# Altium PCB KSIMU.PcbDoc
Units mil, origin at the board's own origin, x right, y up, seen from the top; angles counter-clockwise.
Board outline 590.55 x 1496.06 mil, 4 copper layers (Top Layer, Mid-Layer 1, Mid-Layer 2, Bottom Layer), stack 37.795 mil thick; 53 components, 52 nets, 226 pads, 129 vias.
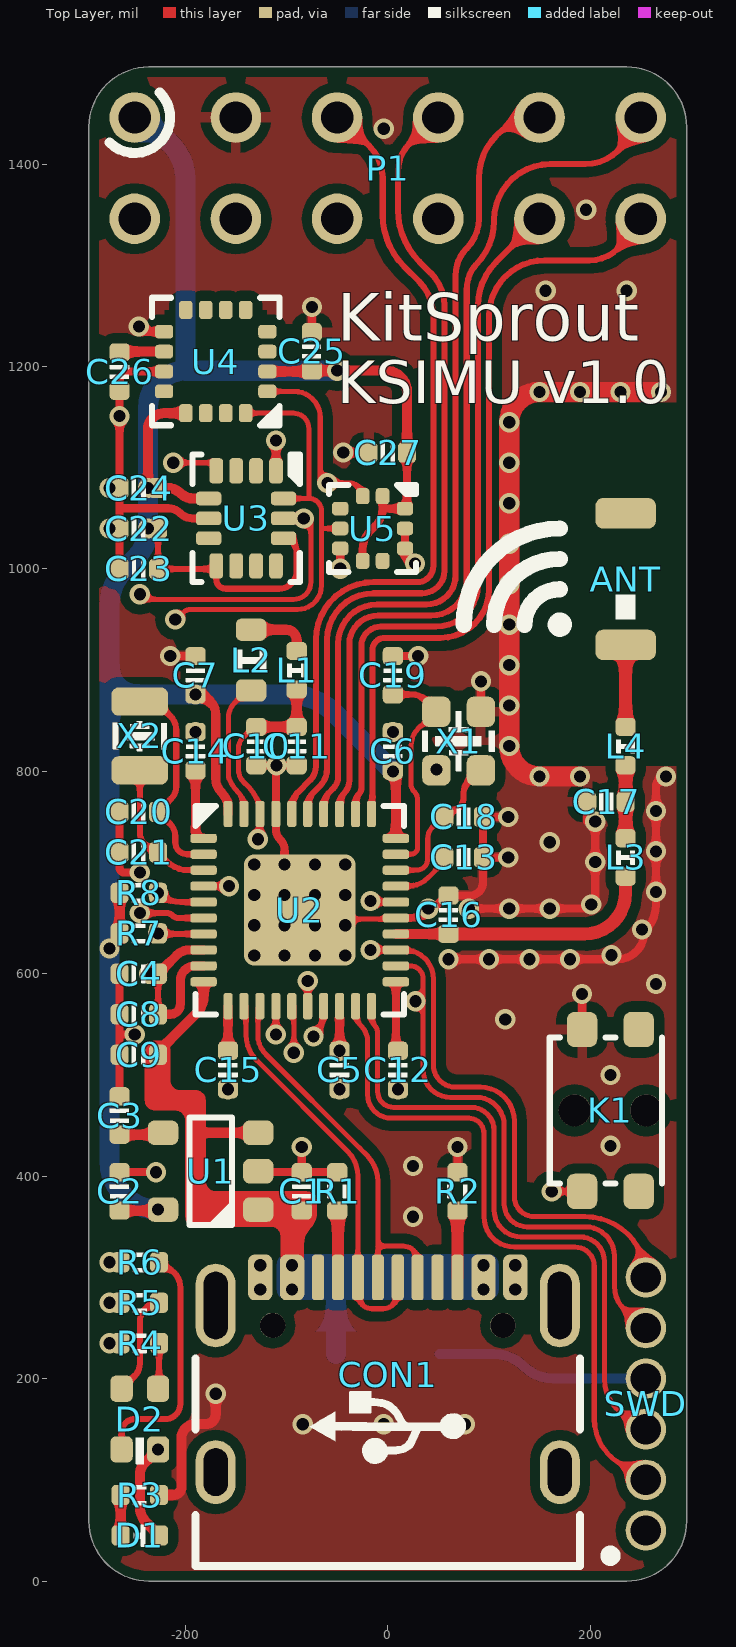
[diagram p0: Top Layer view]
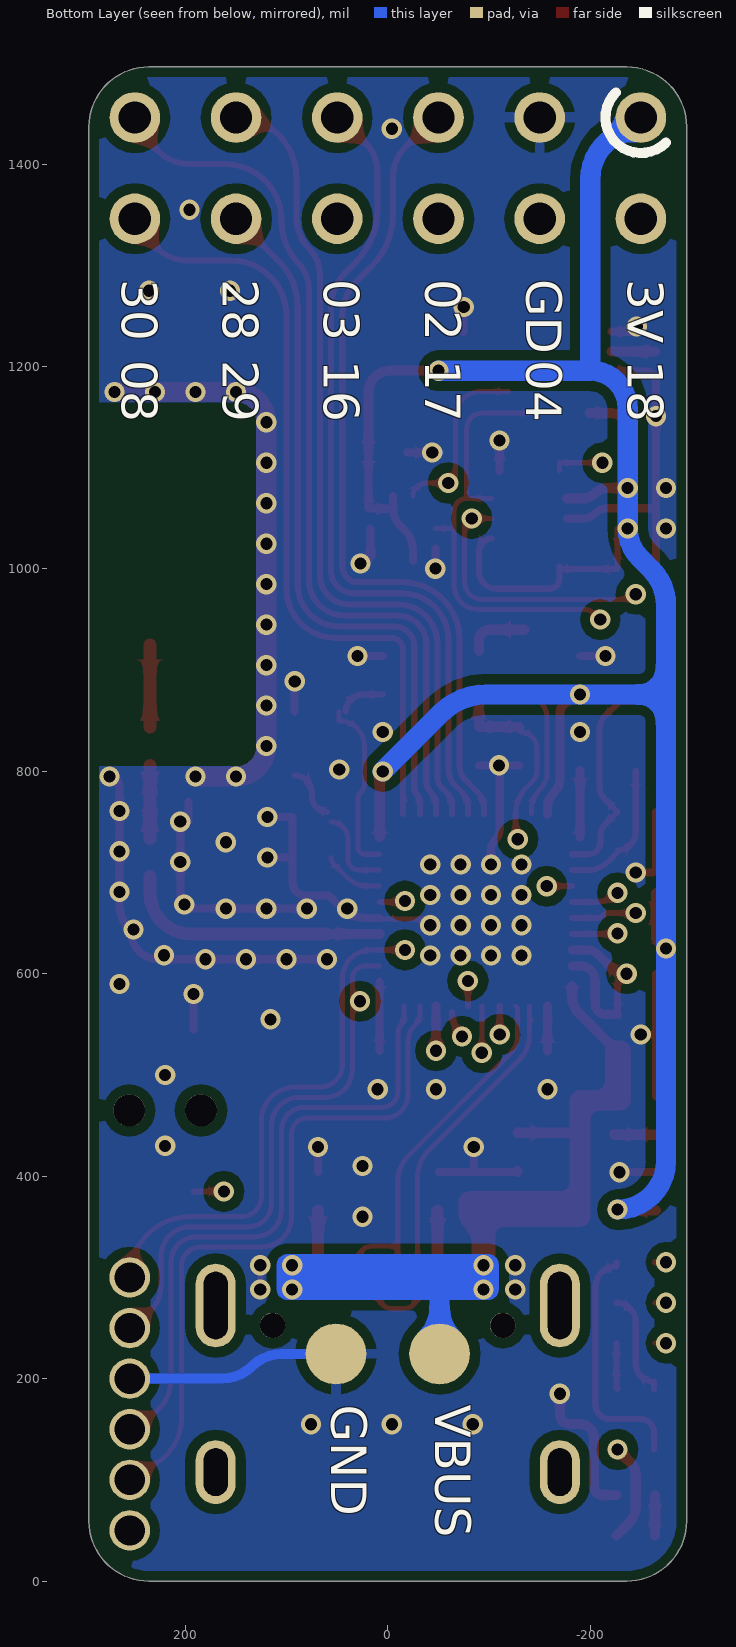
[diagram p1: Bottom Layer view, seen from below]
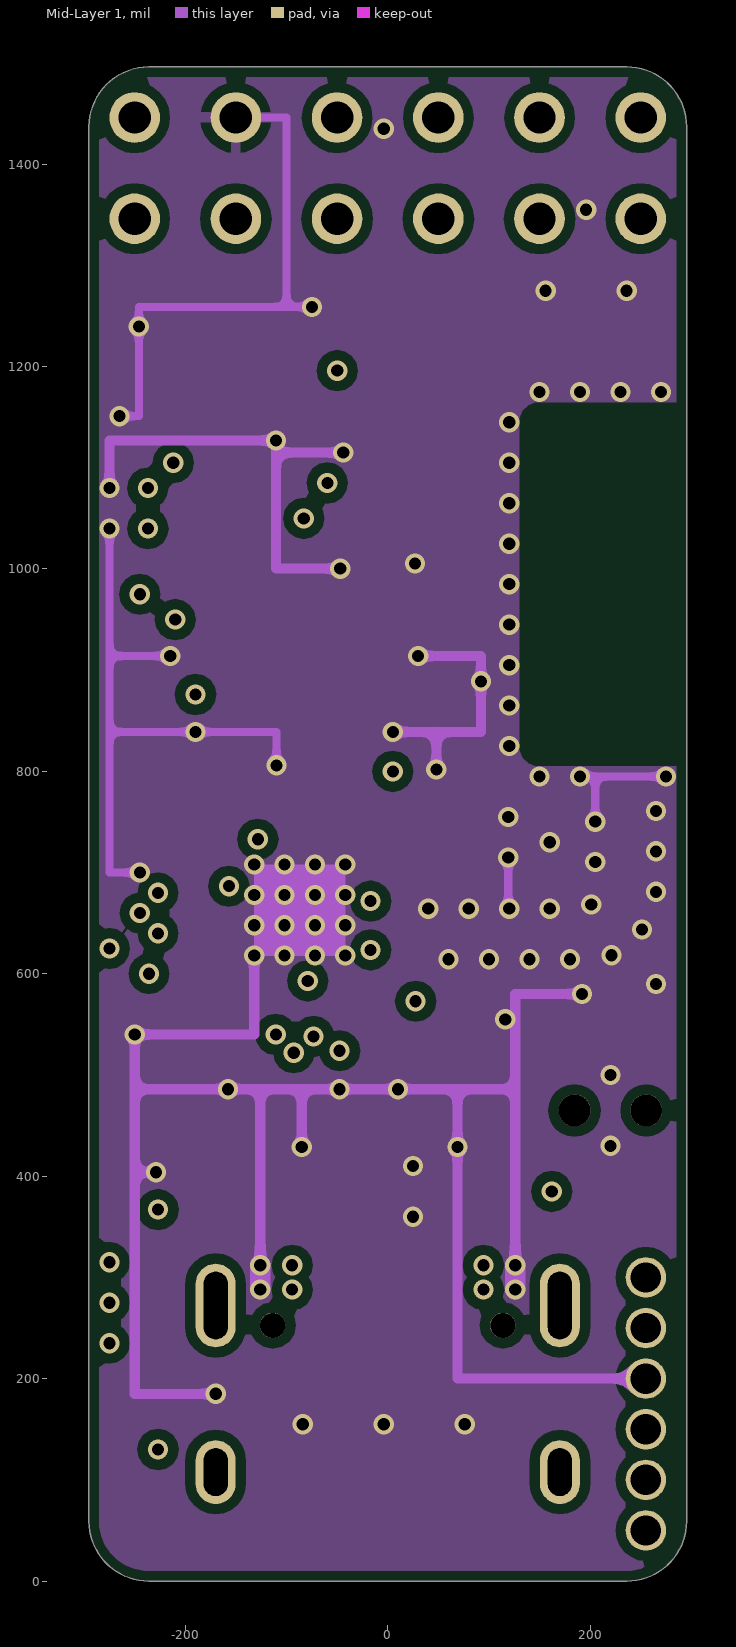
[diagram p2: Mid-Layer 1]
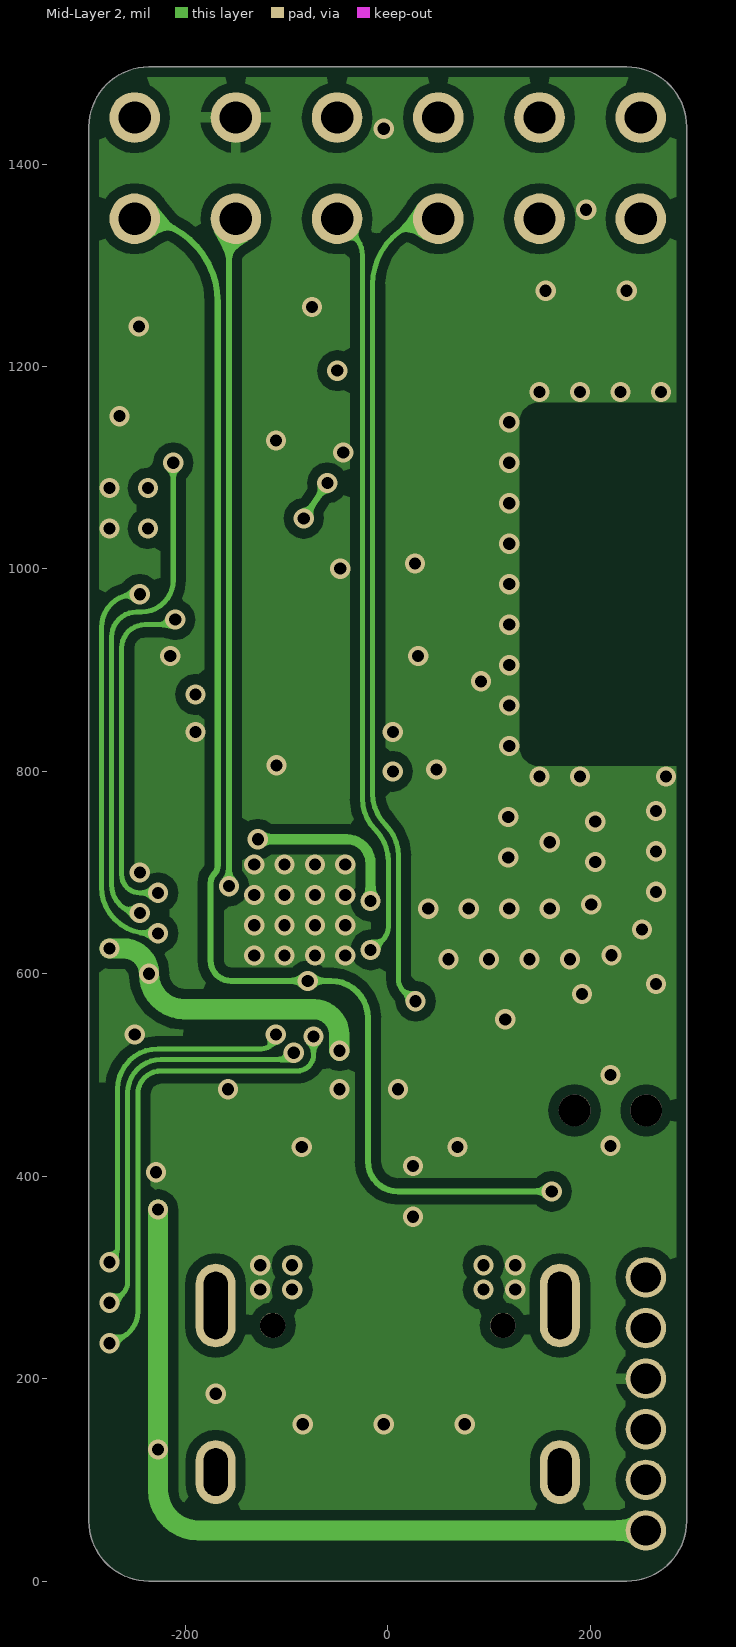
[diagram p3: Mid-Layer 2]
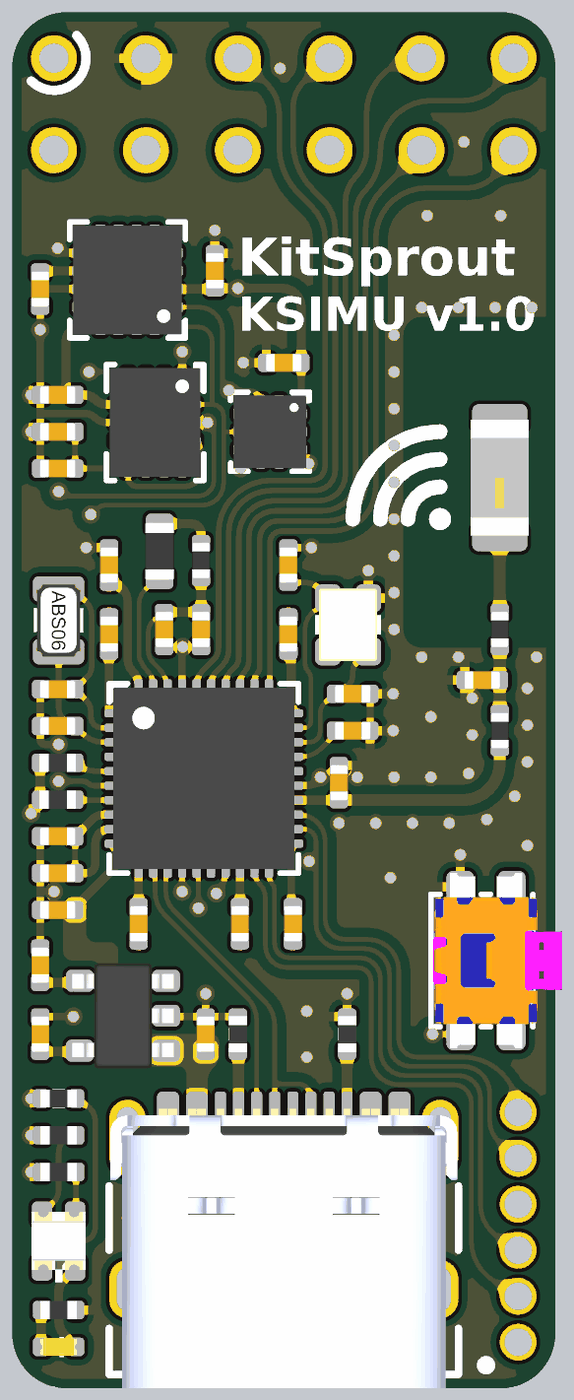
[diagram p4: 3D render of the assembled board from above, using the file's embedded part models]

## Layer stack, top to bottom
Top Solder: solder mask 0.394, Solder Resist, Dk 3.5
Top Layer: signal copper 1.378
Dielectric 1: prepreg 7.677, Dk 4.8
Mid-Layer 1: signal copper 0.689
Dielectric: core 18.307, FR-4, Dk 4.8
Mid-Layer 2: signal copper 0.689
Dielectric2: prepreg 7.677, Dk 4.8
Bottom Layer: signal copper 1.378
Bottom Solder: solder mask 0.3937, Solder Resist, Dk 3.5

## Board outline
-295.28,59.06 -295.28,1437.01 cw(c-236.22,1437.01) -236.22,1496.06 236.22,1496.06 cw(c236.22,1437.01) 295.28,1437.01 295.28,59.06 cw(c236.22,59.06) 236.22,0 -236.22,0 cw(c-236.22,59.06)

## Design rules (kind name [scope] priority, off if disabled: settings)
BoardOutlineClearance [All] p1: gap=10 ignorepadtopadclearanceinfootprint=FALSE except(0: Track-OutlineEdge Track-CavityEdge Track-CutoutEdge Track-SplitBarrior Track-SplitContinuation Text-OutlineEdge Text-CavityEdge Text-CutoutEdge Text-SplitBarrior Text-SplitContinuation)
Clearance "Clearance Polygon 10mil" [InPolygon] p1: gap=10 ignorepadtopadclearanceinfootprint=TRUE except(0: Arc-Hole Track-Hole SMDPad-Hole THPad-Hole Via-Hole Fill-Hole Poly-Hole Region-Hole Text-Hole)
Clearance "Clearance Top Layer 6mil" [OnLayer('Top Layer')] p2 off: gap=6 ignorepadtopadclearanceinfootprint=TRUE except(8: Arc-THPad Arc-Hole Track-THPad Track-Hole SMDPad-THPad SMDPad-Hole THPad-THPad THPad-Hole Via-Hole Fill-Hole Poly-Hole Region-Hole Text-Hole; 10: Arc-Text Track-Text SMDPad-Text THPad-Text Via-Text Fill-Text Poly-Text Region-Text Text-Text)
Clearance "Clearance Top Layer 5mil" [OnLayer('Top Layer')] p3: gap=5 ignorepadtopadclearanceinfootprint=TRUE except(8: Arc-THPad Arc-Hole Track-THPad Track-Hole SMDPad-THPad SMDPad-Hole THPad-THPad THPad-Hole Via-Hole Fill-Hole Poly-Hole Region-Hole Text-Hole; 10: Arc-Text Track-Text SMDPad-Text THPad-Text Via-Text Fill-Text Poly-Text Region-Text Text-Text)
Clearance "Clearance Bottom Layer 6mil" [OnLayer('Bottom Layer')] p4 off: gap=6 ignorepadtopadclearanceinfootprint=TRUE except(8: Arc-THPad Arc-Hole Track-THPad Track-Hole SMDPad-THPad SMDPad-Hole THPad-THPad THPad-Hole Via-Hole Fill-Hole Poly-Hole Region-Hole Text-Hole; 10: Arc-Text Track-Text SMDPad-Text THPad-Text Via-Text Fill-Text Poly-Text Region-Text Text-Text)
Clearance "Clearance Bottom Layer 5mil" [OnLayer('Bottom Layer')] p5: gap=5 ignorepadtopadclearanceinfootprint=TRUE except(8: Arc-THPad Arc-Hole Track-THPad Track-Hole SMDPad-THPad SMDPad-Hole THPad-THPad THPad-Hole Via-Hole Fill-Hole Poly-Hole Region-Hole Text-Hole; 10: Arc-Text Track-Text SMDPad-Text THPad-Text Via-Text Fill-Text Poly-Text Region-Text Text-Text)
Clearance "Clearance 6mil" [All] p6 off: gap=6 ignorepadtopadclearanceinfootprint=TRUE except(8: Arc-THPad Arc-Hole Track-THPad Track-Hole SMDPad-THPad SMDPad-Hole THPad-THPad THPad-Hole Via-Hole Fill-Hole Poly-Hole Region-Hole Text-Hole; 10: Arc-Text Track-Text SMDPad-Text THPad-Text Via-Text Fill-Text Poly-Text Region-Text Text-Text)
Clearance "Clearance 5mil" [All] p7: gap=5 ignorepadtopadclearanceinfootprint=TRUE except(8: Arc-THPad Arc-Hole Track-THPad Track-Hole SMDPad-THPad SMDPad-Hole THPad-THPad THPad-Hole Via-Hole Fill-Hole Poly-Hole Region-Hole Text-Hole; 10: Arc-Text Track-Text SMDPad-Text THPad-Text Via-Text Fill-Text Poly-Text Region-Text Text-Text)
Clearance "Clearance 4mil" [All] p8 off: gap=5 ignorepadtopadclearanceinfootprint=TRUE except(4: Arc-Arc Arc-Track Arc-SMDPad Track-Track Track-SMDPad SMDPad-SMDPad; 8: Arc-THPad Arc-Hole Track-THPad Track-Hole SMDPad-THPad SMDPad-Hole THPad-THPad THPad-Hole Via-Hole Fill-Hole Poly-Hole Region-Hole Text-Hole; 10: Arc-Text Track-Text SMDPad-Text THPad-Text Via-Text Fill-Text Poly-Text Region-Text Text-Text)
ComponentClearance [All] p1: gap=0 collisioncheckmode=3 verticalgap=0 showdistances=FALSE
DiffPairsRouting [All] p1: maxlimit=10 minlimit=5 mostfreqgap=10 toplayer_minwidth=5 toplayer_maxwidth=15 toplayer_prefwidth=15 midlayer1_minwidth=5 midlayer1_maxwidth=15 midlayer1_prefwidth=15 midlayer2_minwidth=5 midlayer2_maxwidth=15 midlayer2_prefwidth=15 bottomlayer_minwidth=5 bottomlayer_maxwidth=15 bottomlayer_prefwidth=15 maxuncoupledlength=500
Height [All] p1: minheight=0 maxheight=5000 prefheight=500
HoleSize [All] p1: absolutevalues=TRUE maxlimit=248.03 minlimit=8 maxpercent=80.000 minpercent=20.000
MinimumAnnularRing [All] p1: minimumring=3
MinimumSolderMaskSliver [All] p1: minsoldermaskwidth=0
PlaneConnect [All] p1: pad.planeconnectstyle=Relief pad.reliefexpansion=20 pad.reliefentries=4 pad.reliefconductorwidth=10 pad.reliefairgap=10 via.planeconnectstyle=Direct via.reliefexpansion=20 via.reliefentries=4 via.reliefconductorwidth=10 via.reliefairgap=10
PolygonConnect [All] p1: thpad.connectstyle=Relief thpad.reliefconductorwidth=10 thpad.reliefentries=4 thpad.polygonreliefangle="90 Angle" thpad.airgapwidth=10 smdpad.connectstyle=Relief smdpad.reliefconductorwidth=10 smdpad.reliefentries=4 smdpad.polygonreliefangle="90 Angle" smdpad.airgapwidth=10 via.connectstyle=Direct via.reliefconductorwidth=10 via.reliefentries=4 via.polygonreliefangle="90 Angle" via.airgapwidth=10
RoutingCorners [All] p1: cornerstyle=Round minsetback=100 maxsetback=100
RoutingVias [All] p1: holewidth=20 width=40 viastyle="Through Hole" minholewidth=8 minwidth=18 maxholewidth=40 maxwidth=80
SMDEntry [All] p1: side=TRUE corner=TRUE anyangle=TRUE
SMDToCorner [All] p1: distance=0
SMDToPlane [All] p1: distance=0
SilkToSilkClearance [All] p1: silktosilkclearance=4
SilkToSolderMaskClearance [IsPad] p1: minsilkscreentomaskgap=0 clearancetoexposedcopper=TRUE
SolderMaskExpansion [All] p1: expansion=4 istentingtop=FALSE
UnRoutedNet [All] p1: checkbadconnections=TRUE
ViasUnderSMD [All] p1: allowed=TRUE
Width "Width 6mil" [All] p1 off: maxlimit=100 minlimit=3.5 preferedwidth=15 toplayer_minwidth=6 bottomlayer_minwidth=6 minimp=50.000000 maximp=50.000000 favimp=50.000000
Width "Width 5mil" [All] p2: maxlimit=100 minlimit=3.5 preferedwidth=15 toplayer_minwidth=5 bottomlayer_minwidth=5 minimp=50.000000 maximp=50.000000 favimp=50.000000
20 further rules are at their usual default settings.

## Components (designator, comment, footprint, x,y, rotation, side; value= is the part's Value field where it differs from the comment)
ANT "2450AT18B100E" ANT_2.4G_3.2x1.6 235,990 r90 top value=-0.5dBi
C1 "C0402" CAP_0402 -85,385 r270 top value=4.7uF
C2 "C0402" CAP_0402 -265,385 r270 top value=4.7uF
C3 "C0402" CAP_0402 -265,460 r270 top value=NC
C4 "C0402" CAP_0402 -246,600 r0 top value=4.7uF
C5 "C0402" CAP_0402 -47.63,505 r90 top value=100nF
C6 "C0402" CAP_0402 5,820 r270 top value=100nF
C7 "C0402" CAP_0402 -190,895 r270 top value=1uF
C8 "C0402" CAP_0402 -246,560 r0 top value=4.7uF
C9 "C0402" CAP_0402 -246,520 r0 top value=4.7uF
C10 "C0402" CAP_0402 -130,825 r90 top value=1uF
C11 "C0402" CAP_0402 -90,825 r90 top value=47nF
C12 "C0402" CAP_0402 10,505 r90 top value=820pF
C13 "C0402" CAP_0402 75,715 r180 top value=100pF
C14 "C0402" CAP_0402 -190,820 r270 top value=100nF
C15 "C0402" CAP_0402 -157.87,505 r90 top value=4.7uF
C16 "C0402" CAP_0402 60,658.38 r270 top value=NC
C17 "C0402" CAP_0402 216,770 r0 top value=1.2pF
C18 "C0402" CAP_0402 75,755 r180 top value=10pF
C19 "C0402" CAP_0402 5,895 r270 top value=10pF
C20 "C0402" CAP_0402 -246,760 r0 top value=10pF
C21 "C0402" CAP_0402 -246,720 r0 top value=10pF
C22 "C0402" CAP_0402 -246,1040 r0 top value=100nF
C23 "C0402" CAP_0402 -246,1000 r0 top value=2.2uF
C24 "C0402" CAP_0402 -246,1080 r0 top value=100nF
C25 "C0402" CAP_0402 -75,1215 r270 top value=1uF
C26 "C0402" CAP_0402 -265,1195 r90 top value=4.7uF
C27 "C0402" CAP_0402 0,1115 r0 top value=0.1uF
CON1 "USB Type C" USB_TypeC_16P 0,150 r0 top locked value="Type C"
D1 "D0402" LED_0402_YELLOW -245,45 r0 top value=WHITE
D2 "D1616" LED_1616_RGB -245,160 r270 top value=RGB
K1 "TACT" Button_TACT_90_4P_3.5x3.55_H 220,465 r90 top locked value=4P
L1 "H0402" IND_0402 -90,900 r90 top value=15nH
L2 "H0603" IND_0603 -135,910 r270 top value=10uH
L3 "H0402" IND_0402 235,715 r90 top value=4.7nH
L4 "H0402" IND_0402 235,825 r90 top value=2.2nH
P1 "HDR2x6" HDR2X6_2.54_180 -0.07,1396.06 r90 top locked value=2.54
R1 "R0402" RES_0402 -50,385 r270 top value=5K1
R2 "R0402" RES_0402 68.9,385 r270 top value=5K1
R3 "R0402" RES_0402 -245,85 r180 top value=5K1
R4 "R0402" RES_0402 -245,235 r0 top value=2K
R5 "R0402" RES_0402 -245,275 r0 top value=10K
R6 "R0402" RES_0402 -245,315 r0 top value=2K
R7 "R0402" RES_0402 -246,640 r180 top value=3K3
R8 "R0402" RES_0402 -246,680 r180 top value=3K3
SWD "HDR1x6" HDR1X6_1.27_180F 255,175 r180 top locked value=1.27
U1 "XC6220B331" SOT23-5 -175,405 r180 top value=3V3
U2 "nRF52820-QDAA" QFN40_P0.4_5.0x5.0_H -87,663 r0 top locked value=64MHz
U3 "ICM42605" ICMx_LGA14_P0.5_2.5x3.0 -140,1050 r270 top
U4 "IST8308" ISTX_LGA16_P0.5_3.0x3.0 -170,1205 r180 top
U5 "LPS22HB" LPSx_LGA10_P0.5_2.0x2.0 -15,1040 r270 top
X1 "XTAL2016" XT_2016_4 70,830 r270 top value=32MHz
X2 "XTAL2012" XT_2012_2 -245,835 r270 top value=32.768kHz

## Footprints (in the part's own frame and the unit in brackets; to place one, negate y for a bottom-side part, rotate by r counter-clockwise, add the part's x,y. Pads: shape width x height; smd on the part's side, far side on the other; paste and mask are expansions set on the pad)
ANT_2.4G_3.2x1.6 [mil]
  rrect50% 30x60 smd: 1(-65,0) 2(65,0)
  silkscreen extent -40,-10 -15,10, body extent -63,-31 63,31, height 51
Button_TACT_90_4P_3.5x3.55_H [mil] "SKSCLDE010"
  rrect50% 35x30 smd: 1(-80,-28) 2(80,-28) 3(-80,28) 4(80,28)
  round 31.5 hole 31.5 unplated mask+0: ""(0,35.43) ""(0,-35.43)
  silkscreen extent -72,-51 72,60, body extent -95,-83 95,57, height 50
CAP_0402 [mil]
  rrect50% 18x20 smd: 1(-19,0) 2(19,0)
  silkscreen extent -7,-9 7,9, body extent -20,-10 20,10, height 20
HDR1X6_1.27_180F [mil]
  round 40 hole 30: 1(0,125) 2(0,75) 3(0,25) 4(0,-25) 5(0,-75) 6(0,-125)
HDR2X6_2.54_180 [mil]
  round 50 hole 32: 1(-50,250) 2(50,250) 3(-50,150) 4(50,150) 5(-50,50) 6(50,50) 7(-50,-50) 8(50,-50) 9(-50,-150) 10(50,-150) 11(-50,-250) 12(50,-250)
ICMx_LGA14_P0.5_2.5x3.0 [mil]
  rrect50% 25x13.5 smd: 1(-47,29.53) 2(-47,9.84) 3(-47,-9.84) 4(-47,-29.53) 8(47,-29.53) 9(47,-9.84) 10(47,9.84) 11(47,29.53)
  rrect50% 13.5x25 smd: 5(-19.68,-37) 6(0,-37) 7(19.69,-37) 12(19.69,37) 13(0,37) 14(-19.68,37)
  silkscreen extent -63,-53 63,53, body extent -59,-49 59,49, height 38
IND_0402 [mil]
  rrect50% 18x20 smd: 1(-19,0) 2(19,0)
  silkscreen extent -7,-9 7,9, body extent -20,-10 20,10, height 20
IND_0603 [mil]
  rrect50% 22x30 smd: 1(-30,0) 2(30,0)
  silkscreen extent -10,-15 10,15, body extent -31,-16 31,16, height 31
ISTX_LGA16_P0.5_3.0x3.0 [mil]
  rrect50% 18x13.5 smd: 1(-51,29.53) 2(-51,9.84) 3(-51,-9.84) 4(-51,-29.53) 9(51,-29.53) 10(51,-9.84) 11(51,9.84) 12(51,29.53)
  rrect50% 13.5x18 smd: 5(-29.53,-51) 6(-9.84,-51) 7(9.84,-51) 8(29.53,-51) 13(29.53,51) 14(9.84,51) 15(-9.84,51) 16(-29.53,51)
  silkscreen extent -63,-63 63,63, body extent -59,-59 59,59, height 39
LED_0402_YELLOW [mil]
  rrect50% 18x20 smd: 1(19,0.01) 2(-19,0.01)
  silkscreen extent -6,-11 6,10, body extent -20,-10 20,10, height 18
LED_1616_RGB [mil]
  rrect50% 26x22 smd: 1(-30,-18) 2(-30,18) 3(30,18) 4(30,-18)
  silkscreen extent 18,-3 44,4, body extent -32,-29 31,30, height 13
LPSx_LGA10_P0.5_2.0x2.0 [mil]
  rrect50% 16x13.5 smd: 1(-32,9.84) 2(-32,-9.84) 6(32,-9.84) 7(32,9.84)
  rrect50% 13.5x16 smd: 3(-19.68,-32) 4(0,-32) 5(19.69,-32) 8(19.69,32) 9(0,32) 10(-19.68,32)
  silkscreen extent -43,-43 43,43, body extent -39,-39 39,39, height 31
QFN40_P0.4_5.0x5.0_H [mil]
  rrect50% 26x9 smd: 1(-95,70.87) 2(-95,55.12) 3(-95,39.37) 4(-95,23.62) 5(-95,7.87) 6(-95,-7.87) 7(-95,-23.62) 8(-95,-39.37) 9(-95,-55.12) 10(-95,-70.87) 21(95,-70.87) 22(95,-55.12) 23(95,-39.37) 24(95,-23.62) 25(95,-7.87) 26(95,7.87) 27(95,23.62) 28(95,39.37) 29(95,55.12) 30(95,70.87)
  rrect50% 9x26 smd: 11(-70.87,-95) 12(-55.12,-95) 13(-39.37,-95) 14(-23.62,-95) 15(-7.87,-95) 16(7.87,-95) 17(23.62,-95) 18(39.37,-95) 19(55.12,-95) 20(70.87,-95) 31(70.87,95) 32(55.12,95) 33(39.37,95) 34(23.62,95) 35(7.87,95) 36(-7.87,95) 37(-23.62,95) 38(-39.37,95) 39(-55.12,95) 40(-70.87,95)
  rrect20% 110x110 smd paste-100: 41(0,0)
  rrect20% 45x45 on Top Paste: ""(-27,-27) ""(-27,27) ""(27,-27) ""(27,27)
  silkscreen extent -103,-103 103,103, body extent -98,-98 98,98, height 33
RES_0402 [mil]
  rrect50% 18x20 smd: 1(-19,0) 2(19,0)
  silkscreen extent -7,-10 7,10, body extent -20,-10 20,10, height 14
SOT23-5 [mil]
  rrect50% 30x24 smd: 1(-47,38) 2(-47,0) 3(-47,-38) 4(47,-38) 5(47,38)
  silkscreen extent -21,-53 21,53, body extent -55,-57 55,57, height 45
USB_TypeC_16P [mm]
  rrect50% 0.61x1.143 smd: 1(-3.2,3.81) 2(-2.4,3.81) 11(2.4,3.81) 12(3.2,3.81)
  rrect50% 0.305x1.143 smd: 3(-1.75,3.81) 4(-1.25,3.81) 5(-0.75,3.81) 6(-0.25,3.81) 7(0.25,3.81) 8(0.75,3.81) 9(1.25,3.81) 10(1.75,3.81)
  oval 1x2.1 hole 0.6 slot 1.7 at 90 deg: SH(-4.32,3.105) SH(4.32,3.105)
  oval 1x1.6 hole 0.6 slot 1.2 at 90 deg: SH(-4.32,-1.075) SH(4.32,-1.075)
  round 0.635 hole 0.635 unplated mask+0: ""(-2.89,2.605) ""(2.89,2.605)
  silkscreen extent -4.83,-3.43 4.83,1.78, body extent -4.79,-3.8 4.79,3.91, height 3.31
XT_2012_2 [mil]
  rrect50% 28x56 smd: 1(-34,0) 2(34,0)
  silkscreen extent -14,-27 14,27, body extent -39,-24 39,24, height 24
XT_2016_4 [mil]
  rrect50% 30x28 smd: 1(29,22) 2(-29,22) 3(-29,-22) 4(29,-22)
  silkscreen extent -30,-36 30,36, body extent -39,-31 39,32, height 22

## Part data
ANT: library part ANT_2.4G, "Antenna", Specification="2.45GHz 50R", Type=3.2x1.6mm
C1 C2 C3 C4 C5 C6 C7 C8 C9 C10 C11 C12 C13 C14 C15 C16 C17 C18 C19 C20 C21 C22 C23 C24 C25 C26 C27: library part Cap_0402, "Capacitor", Note=±10%, Specification="X7R, 16V", Type=0402
CON1: library part USB_TypeC_16P_A, "USB TypeC", Type=Female
D1: library part LED_0402, "LED", Type=0402
D2: library part LED_1616_RGB, "LED", Type=1616
K1: library part Button_TACT_90_4P_3.5×3.55, "Button", Manufacturer="Alps Alpine", Datasheet=https://tech.alpsalpine.com/prod/e/html/tact/surfacemount/sksc/sksclde010.html, Link=https://www.mouser.tw/ProductDetail/?qs=6EGMNY9ZYDQWpz3nhZNkIQ%3D%3D, Specification=3.5x3.55mm, Type=TACT
L1 L3 L4: library part Ind_0402, "Inductor", Note=±5%, Specification="High frequency chip inductor", Type=0402
L2: library part Ind_0603, "Inductor", Note=±5%, Specification="High frequency chip inductor", Type=0603
P1: library part HDR2x6_2.54, "Header", Note=2x6, Type=DIP
R1 R2 R3 R4 R5 R6 R7 R8: library part Res_0402, "Resistor", Note=±1%, Specification=1/16W, Type=0402
SWD: library part HDR1x6_1.27, "Header", Note=1x6, Type=DIP
U1: library part XC6220x_SOT25, "LDO", Manufacturer="Torex Semiconductor", Datasheet=https://www.torexsemi.com/file/xc6220/XC6220.pdf, Link=https://www.torexsemi.com/products/single-type-voltage-regulators/series/?name=xc6220, Note="MaxInput 6.5V", Specification=1000mA, Type=SOT23-5
U2: "MCU Nordic", Manufacturer="Nordic Semiconductor", Datasheet=https://infocenter.nordicsemi.com/index.jsp?topic=%2Fps_nrf52833%2Fkeyfeatures_html5.html, Link=https://www.nordicsemi.com/Products/Low-power-short-range-wireless/nRF52820, Note=CortexM4, Specification="256K Flash, 32K SRAM", Type="QFN40 P0.4"
U3: "Motion Sensor", Manufacturer="TDK InvenSense", Datasheet=http://invensense.tdk.com/wp-content/uploads/2020/09/DS-000292-ICM-42605-v1.5.pdf, Link=https://invensense.tdk.com/products/motion-tracking/6-axis/icm-42605/, Specification="2.5x3.0x0.91 mm", Type="LGA14 P0.5"
U4: "Magnetometer Sensor", Manufacturer=iSentek, Datasheet=http://www.isentek.com/zhtw/the_product.php?pid=4, Link=http://www.isentek.com/zhtw/the_product.php?pid=4, Specification="3.0x3.0x1.0 mm", Type="LGA16 P0.5"
U5: "Pressure Sensor", Manufacturer=STMicroelectronics, Datasheet=https://www.st.com/resource/en/datasheet/lps22hb.pdf, Link=https://www.st.com/content/st_com/en/products/mems-and-sensors/pressure-sensors/lps22hb.html, Specification="2.0x2.0x0.76 mm", Type="LGA10 P0.5"
X1: library part XTAL_2016_4P, "Crystal Oscillator", Specification=±10ppm, Type=XTAL2016_4P
X2: library part XTAL_32.768k_2P, "Crystal Oscillator", Specification=±10ppm, Type=XTAL2012_2P

## Free pads (board coordinates)
  round 60 smd far side paste-100: 1(-51.18,224.41) 2(51.18,224.41)

## Via types
v1: diameter 20, hole 12, Top Layer to Bottom Layer, tented both sides, 129 vias

## Nets (pads, with @x,y where several pads share a name; then routed paths per layer and width w, separated by ;. In a path a pad name is that pad's centre, name@x,y a point inside that pad or via, vN(x,y) a via of type N, cw(c..) or ccw(c..) an arc to the next point about the centre after c; other vN are vias at no path point)
+3V3: C2.2 C4.2 C5.2 C6.2 C7.2 C8.2 C22.2 C23.2 C24.2 C25.2 C27.2 D1.1 D2.3 P1.2 R7.2 R8.2 SWD.1 U1.5 U2.8 U2.9 U2.18 U2.30 U2.40 U3.5 U3.8 U3.12 U4.2 U4.13 U5.1 U5.6 U5.10 | length 4092.3
  Top Layer w6: v1(-237,1080) C24.2 ; v1(-236,600) cw(c-236,591) -227,591 C8.2 ; C22.2 C23.2 U3.8@-169.53,1000 ; U3.8 U3.8@-169.53,1000 ; U3.12 cw(c-103,1017.31) -90,1017.31 -90,998 cw(c-107.5,998) -107.5,980.5 -160,980.5 cw(c-160,990.03) -169.53,990.03 U3.8@-169.53,1000 ; C25.2@-75.84,1195.16 -75.84,1196 C25.2
  Top Layer w8: U5.6 -24.84,1019.08 cw(c1.9,1019.08) -17.02,1037.98 -12.12,1042.88 ccw(c-28.92,1059.68) -5.16,1059.68 ; U5.1 -5.16,1059.68 ; U5.10 -5.16,1059.68 ; U5.10@19,1059.68 C27.2
  Top Layer w9: C8.2 -215,560 ccw(c-215,570) -205,570 -205,593 cw(c-190.12,593) -190.12,607.88 U2.9 ; C4.2@-226,601 -208.49,618.51 cw(c-196.12,606.12) -196.12,623.63 U2.8 ; v1(-190,876) cw(c-190,856) -170,856 -170,792.86 ccw(c-151.03,792.86) -164.44,779.44 cw(c-180.32,763.56) -157.87,763.56 U2.40 ; v1(-47.63,524) U2.18
  Top Layer w10: v1(-275,625) -265,635 R7.2 R8.2 ; C2.2 U1.5@-223,366 ; v1(-237,1080) -237,1138 cw(c-221,1138) -221,1154 U4.13 ; v1(-227,130) -240,117 ccw(c-227.93,104.93) -245,104.93 -245,74 ccw(c-220.87,74) -237.94,56.95 D1.1 ; C24.2 -217.29,1080 cw(c-217.29,1062.39) -204.85,1074.85 ; -204.82,1074.82 ccw(c-192.39,1087.29) -192.39,1069.68 U3.5 ; U4.2 C25.2@-75.84,1195.16 ; C25.2 v1(-50,1196) -2,1196 cw(c-2,1175) 19,1175 C27.2 ; U2.30@8,735 C6.2@8,793 ; SWD.1@250.01,45.01 SWD.1
  Mid-Layer 2 w20: v1(-275,625) -261,625 cw(c-261,600) v1(-236,600) ccw(c-201,600) -201,565 -73,565 cw(c-73,540) -48,540 -48,524.37 v1(-47.63,524) ; v1(-227,367) v1(-227,130) -227,90 ccw(c-187,90) -187,50 SWD.1
  Bottom Layer w20: P1.2 -250.07,1435.07 cw(c-250.07,1385) -200,1385 -200,1196 ; v1(-227,367) cw(c-227,415) -275,415 v1(-275,625) -275,876 ; v1(-50,1196) -200,1196 ; v1(5,800) -52.5,857.5 ccw(c-97.16,812.84) -97.16,876 v1(-190,876) -275,876 ; -275,876 -275,945 -275,963.79 cw(c-223.79,963.79) -260,1000 -249.02,1010.98 ccw(c-278.04,1040) v1(-237,1040) v1(-237,1080) -237,1159 cw(c-200,1159) -200,1196
+VBUS: C1.2 C9.2 CON1.2 CON1.11 pad.1 U1.1 U1.3 U2.10 | length 616.2
  Top Layer w10: U2.10@-182,588 -182,578 cw(c-206.14,578) -189.07,560.93 -224.88,525.12 ccw(c-219.76,520) C9.2 -227,470 -190,470 -190,443 ; U1.3 -190,443 ; CON1.2 v1(-94.49,312) C1.2@-94.49,366 ; C1.2 C1.2@-94.49,366 ; -190,443 -190,366 -128,366 C1.2@-94.49,366
  Bottom Layer w20: v1(-94.49,288) -51.18,288 pad.1
  other v1: 94.49,288 94.49,312
ANT: ANT.1 L4.2 | length 81
  Top Layer w13: L4.2 ANT.1
CAP: C26.2 U4.10 | length 44.3
  Top Layer w5: C26.2 C26.2@-264.16,1214.84
  Top Layer w10: C26.2@-264.16,1214.84 U4.10
CC1: CON1.4 R1.2 | length 70.2
  Top Layer w6: R1.2@-49.21,366 R1.2@-45,366
  Top Layer w12: CON1.4 R1.2@-49.21,366
CC2: CON1.10 R2.2 | length 66
  Top Layer w12: CON1.10 R2.2
D+: CON1.6 CON1.8 U2.13 | length 362.8
  Top Layer w5: -128.37,539.72 ccw(c-100.97,539.72) -120.34,520.34 -27.66,427.66 -20.61,420.6 cw(c-46.59,394.62) -9.84,394.62 -9.84,330.92 ; -128.37,539.76 -128.37,566 U2.13 ; CON1.6 -9.84,330.92 ; CON1.8@29.68,316.67 ccw(c15.43,316.67) 15.43,330.92 -9.84,330.92
D-: CON1.5 CON1.7 U2.12 | length 366.4
  Top Layer w5: U2.12@-140.12,568 -140.12,540 ccw(c-104.19,540) -129.6,514.6 -39.8,424.8 cw(c-64.6,400) -29.53,400 CON1.5 ; CON1.5@-29.68,283.33 ccw(c-15.43,283.33) -15.43,269.08 -4.57,269.08 ccw(c-4.57,283.33) CON1.7@9.69,283.33
DCC: L2.2 U2.39 | length 134.3
  Top Layer w5: U2.39 -142.12,766.13 ccw(c-159.56,766.13) -147.21,778.44 cw(c-116.16,809.51) -156.74,792.7 cw(c-147.5,796.53) -157.5,796.53 -157.5,852.5 cw(c-135,852.5) L2.2@-135,875
DEC1: C14.2 U2.1 | length 66
  Top Layer w9: U2.1@-190,735 C14.2
DEC3: C13.2 U2.27 | length 60.5
  Top Layer w5: U2.27 19.77,686.62 ccw(c19.77,715.23) 40,695 53.17,708.17 ccw(c46.34,715) C13.2
DEC4: C10.2 C11.2 L1.1 U2.26 U2.38 | length 386.1
  Top Layer w5: C10.2@-131,839 ccw(c-131,822.5) -147.5,822.5 -147.5,801.5 ccw(c-130.6,801.5) -142.56,789.56 -137.24,784.24 cw(c-163.48,758) U2.38
  Top Layer w6: v1@-126.37,733 U2.38 ; v1@-16.99,670.86 U2.26
  Top Layer w10: C10.2 C11.2 L1.1
  Mid-Layer 2 w10: v1(-128.37,733) -40.92,733 cw(c-40.92,709.08) -17,709.08 v1(-17,671.85)
DEC5: C12.2 U2.21 | length 68.1
  Top Layer w8: C12.2@8,524 U2.21
DECUSB: C15.2 U2.11 | length 44
  Top Layer w9: C15.2 U2.11
GND: C1.1 C2.1 C3.1 C4.1 C5.1 C6.1 C7.1 C8.1 C9.1 C10.1 C11.1 C12.1 C13.1 C14.1 C15.1 C16.1 C17.1 C18.1 C19.1 C20.1 C21.1 C22.1 C23.1 C24.1 C25.1 C26.1 C27.1 CON1.1 CON1.12 K1.4 P1.4 pad.2 R1.1 R2.1 R3.1 SWD.4 U1.2 U2.25 U2.37 U2.41 U3.1 U3.6 U4.9 U4.11 U5.5 U5.8 U5.9 X1.2 X1.4 | length 7150.5
  Top Layer w5: v1(-42,648) -36,654 U2.25@8,654
  Top Layer w6: v1(125.98,288) CON1.12
  Top Layer w8: C2.1 v1(-229,404) ; C3.1 C9.1 -265,540 ; C4.1 C8.1 -265,540 ; C20.1 C21.1 -265,705 ccw(c-260,705) -260,700 v1(-245,700) ; C23.1 C22.1 -265,1060 ; v1(-250,540) -265,540 ; v1@-246,1234.53 U4.9 ; U4.11 -255.42,1195.16 ccw(c-255.42,1185.58) -265,1185.58 C26.1 v1(-265,1151) C24.1 -265,1060 ; v1(-215,914) C7.1 ; U3.6 -192.93,1050 cw(c-192.93,1067.07) -205,1055 ccw(c-217.07,1042.93) -217.07,1060 -265,1060 ; C10.1 v1@-110.62,806 ; U1.2@-128,404 C1.1 ; U3.1 v1(-110.47,1127) ; -106.3,732.67 cw(c-116.72,722.28) -102,722.28 v1(-102,708) ; -106.31,732.69 cw(c-95.9,743.1) -110.62,743.1 U2.37 v1@-110.62,806 ; C11.1 v1(-110,806) v1@-110.62,806 ; v1(-85,429) C1.1 ; C25.1 v1(-75,1259) ; R1.1 C1.1 ; v1(-47,1000.31) U5.5 ; v1(-44,1115) C27.1 ; C19.1 v1(30,914) ; U2.25 22.66,655.13 ccw(c22.66,686.71) 45,664.38 56.59,675.96 cw(c60,672.55) C16.1 81.38,677.38 ccw(c81.38,690) 94,690 C13.1 ; U5.8@17,1015.31 ccw(c27,1015.31) v1(27,1005.31) ; U5.8 U5.9 ; v1(60,614.38) v1(100,614.38) v1(140,614.38) v1(180,614.38) 220,614.38 227,614.38 ccw(c227,640.66) 253.28,640.66 ccw(c225,668.95) 265,668.95 v1(265,681) v1(265,721) v1(265,761) 265,785 cw(c275,785) v1(275,795) ; R2.1 v1(68.9,429) ; v1(80,664.38) v1(120,664.38) v1(160,664.38) 200,664.38 205,664.38 v1(205,710.36) v1(205,750.36) 197,750.36 C17.1 ; X1.2 v1(92,889) ; v1(119,715) C13.1 ; v1(119,755) C18.1 C13.1 ; K1.4 v1(192,580)
  Top Layer w10: R3.1 -211.88,85 ccw(c-211.88,93) -203.88,93 -203.88,141.12 cw(c-190,141.12) -190,155 -180,155 ccw(c-180,165) -170,165 v1(-170,185) ; U1.2@-128,404 U1.2 ; U5.8@17,1015.31 U5.8
  Top Layer w20: v1(190,795) v1(150,795) cw(c150,825) v1(120,825) v1(120,865) v1(120,905) v1(120,945) v1(120,985) v1(120,1025) v1(120,1065) v1(120,1105) v1(120,1145) cw(c150,1145) v1(150,1175) v1(190,1175) v1(230,1175) v1(270,1175)
  Mid-Layer 1 w6: v1(-102,708) v1@-102,711.79
  Mid-Layer 1 w8: v1(-275,1040) -275,914 ; v1(-265,1151) -246,1151 v1(-246,1239.53) -246,1259 -100,1259 ; v1(-245,700) -275,700 -275,839 ; v1(-215,914) -275,914 ; P1.4 -100,1446.06 -100,1259 ; v1(-110,806) -110,839 v1(-190,839) -275,839 ; v1(-75,1259) -100,1259 ; v1(119,715) 119,665.38 ccw(c120,665.38) v1(120,664.38) ; v1(205,750.36) 205,795 v1(190,795) v1(275,795) ; -275,839 -275,914
  Mid-Layer 1 w10: v1(-275,1080) -275,1127 v1(-110.47,1127) -110.47,1115 ; v1(-229,404) -250,404 ; v1(-170,185) -250,185 -250,404 ; v1(-132,618) -132,540 v1(-250,540) -250,486 ; v1(-125.98,312) -125.98,486 ; v1(-85,429) -85,486 ; v1(-47,1000.31) -110.47,1000.31 -110.47,1115 ; v1(-44,1115) -110.47,1115 ; v1(5,839) 48,839 ; v1(30,914) 92,914 v1(92,889) 92,839 48,839 ; v1(48,801.96) 48,839 ; v1(125.98,312) 125.98,486 ; v1(192,580) 125.98,580 125.98,486 ; SWD.4 68.9,200 v1(68.9,429) 68.9,486 ; -250,404 -250,486 ; -250,486 v1(-157.87,486) -125.98,486 ; -125.98,486 -85,486 ; -85,486 v1(-47.63,486) v1(10,486) 68.9,486 ; 68.9,486 125.98,486
  Mid-Layer 1 w20: v1(-125.98,288) v1(-125.98,312) ; v1(125.98,288) v1(125.98,312)
  Bottom Layer w6: v1@-51.87,1115 v1@-49,1115
  Bottom Layer w10: pad.2 104.79,224.41 cw(c104.79,182.74) 134.25,212.2 ccw(c163.72,241.67) 163.72,200 SWD.4
  other v1: -84,155 -4,155 76,155 25,360 25,410 220,430 220,500 116,555 265,590 -102,618 -72,618 -42,618 221,618.38 251.28,643.66 -132,648 -102,648 -72,648 40,664.38 201,668.38 -132,678 -102,678 -72,678 -42,678 -132,708 -72,708 -42,708 160,730 156,1275 236,1275 196,1355 -4,1435
GPIO1: P1.3 U2.4 | length 684.4
  Top Layer w6: U2.4 v1(-157,686.62)
  Mid-Layer 2 w6: v1(-157,686.62) P1.3@-157,1346.06
GPIO2: P1.9 U2.32 | length 701.3
  Top Layer w6: U2.32 -31.88,769.77 cw(c-21.39,769.77) -28.81,777.19 ccw(c-35.27,783.65) -26.13,783.65 -26.13,923.87 cw(c-7,923.87) -7,943 47.44,943 ccw(c47.44,984.56) 89,984.56 89,1260 cw(c149.68,1260) 106.77,1302.91 P1.9
GPIO3: P1.11 U2.31 | length 786.1
  Top Layer w6: U2.31@-15.13,758 -15.13,919.87 cw(c-3,919.87) -3,932 52,932 ccw(c52,980) 100,980 100,1250 cw(c155,1250) 107.19,1277.19 cw(c155,1250) 127.81,1297.81 cw(c155,1250) 155,1305 199.03,1305 ccw(c199.03,1346.06) 240.09,1346.06 P1.11
GPIO4: P1.6 U2.36 | length 822.4
  Top Layer w6: U2.36 -94.87,765.2 cw(c-75.2,765.2) -89.11,779.11 -76.5,791.73 ccw(c-89.77,805) -75.44,792.88 -75.24,793.11 ccw(c-84.5,801.5) -73.12,796.33 -73.05,796.46 ccw(c-89.77,805) -71,805 -71,930.19 cw(c-14.19,930.19) -14.19,987 29.22,987 ccw(c29.22,1002.78) 45,1002.78 45,1250 ccw(c-3.28,1250) 30.88,1284.12 ; P1.6 -50.07,1431.27 cw(c-50.07,1386.2) -5,1386.2 -5,1350 ccw(c67.43,1350) 16.21,1298.79 30.86,1284.14
GPIO5: P1.8 U2.35 | length 817.7
  Top Layer w6: U2.35 -79.13,766.06 cw(c-61.06,766.06) -73.83,778.83 -66.92,785.75 ccw(c-83.62,802.45) -60,802.45 -60,930 cw(c-14,930) -14,976 33.77,976 ccw(c33.77,998.23) 56,998.23 56,1260 ccw(c10.13,1260) 42.59,1292.41 ; 42.57,1292.43 31.21,1303.79 cw(c82.43,1355) 10,1355 10,1392.43 cw(c49.93,1392.43) 49.93,1432.35 P1.8
GPIO6: P1.10 U2.34 | length 820.1
  Top Layer w6: U2.34 -63.38,766.92 cw(c-46.92,766.92) -58.57,778.55 -53.78,783.33 ccw(c-65.31,794.87) -49,794.87 -49,926.41 cw(c-10.41,926.41) -10.41,965 38.33,965 ccw(c38.33,993.67) 67,993.67 67,1289.88 cw(c106.41,1289.92) 70,1305 cw(c102.61,1291.49) 77.68,1316.48 ccw(c47.84,1346.26) 90,1346.26 90,1386.13 cw(c149.93,1386.13) P1.10
GPIO7: P1.12 U2.33 | length 887.9
  Top Layer w6: U2.33 -47.63,767.77 cw(c-32.77,767.77) -43.28,778.28 ccw(c-56.02,791.02) -38,791.02 -38,925.77 cw(c-9.77,925.77) -9.77,954 42.89,954 ccw(c42.89,989.11) 78,989.11 78,1275.19 ; 78,1275.24 cw(c121.74,1275.24) 81.36,1292.05 cw(c104.69,1282.3) 86.79,1300.16 86.85,1300.22 ccw(c42.9,1344.09) 105,1344.09 105,1344.66 cw(c160.34,1344.66) 160.34,1400 195.12,1400 ccw(c195.12,1446.06) 241.19,1446.06 P1.12
IMU_FYC: U3.9
IMU_INT: U2.6 U3.4 | length 612.6
  Top Layer w5: v1(-212,1105) -169.53,1105 U3.4
  Top Layer w6: v1(-245,660) -218.48,660 cw(c-218.48,651.68) -212.59,657.56 ccw(c-206.71,663.45) -206.71,655.13 U2.6
  Mid-Layer 2 w5: v1(-245,660) cw(c-245,688) -273,688 -273,932.7 cw(c-248.2,932.7) -248.2,957.5 -243.38,957.5 ccw(c-243.38,988.88) -212,988.88 v1(-212,1105)
IMU_INTB: U5.7
IMU_SCL: R7.1 U2.7 U3.13 U4.1 U5.2 | length 918.3
  Top Layer w5: v1(-245,975) -240,970 -93,970 ccw(c-93,987) -76,987 v1@-76,1050 ; U4.1 -92.47,1175.47 cw(c-92.47,1149.74) -66.74,1149.74 -66.74,1092 ccw(c-59.74,1092) v1(-59.74,1085) -37.84,1085 cw(c-37.84,1072) U5.2 ; U3.13 v1(-83,1050)
  Top Layer w6: R7.1@-226.38,639.38 U2.7
  Mid-Layer 2 w5: v1@-250,975 ccw(c-250,942) -283,942 -283,686.05 ccw(c-236.95,686.05) -236.95,640 v1(-227,640)
  Mid-Layer 2 w6: v1(-83,1050) v1(-59.74,1085)
IMU_SDA: R8.1 U2.5 U3.14 U4.16 U5.4 | length 831.8
  Top Layer w5: v1@-215,945 v1@-210,945 ; v1(-210,950) -205,950 cw(c-195,950) -195,960 -89.17,960 ccw(c-89.17,983.67) -65.5,983.67 -65.5,1040 -65.5,1057.25 ccw(c-77.94,1057.25) -77.94,1069.68 ; U4.16 -93.4,1154 cw(c-93.4,1138.54) -77.94,1138.54 -77.94,1069.68 ; U3.14 -77.94,1069.68 ; -65,1040 U5.4
  Top Layer w6: v1(-227,680) ccw(c-204.97,702.03) -204.97,670.87 U2.5
  Mid-Layer 2 w5: v1(-227,680) -245,680 cw(c-245,698) -263,698 -263,922 cw(c-240,922) -240,945 -215,945 ccw(c-215,950) v1(-210,950)
IST_CAD0: U4.5
IST_CAD1: U4.6
IST_DRY: U4.15
IST_RST: U4.14
IST_VPP: U4.7
KEY: K1.3 P1.1 U2.16 | length 1364.8
  Top Layer w6: U2.16 v1(-79.13,593) ; v1(162,385) K1.3
  Mid-Layer 2 w6: P1.1 cw(c-250.07,1263.99) -168,1263.99 -168,706.95 cw(c-179.95,706.95) -171.48,698.52 ccw(c-163.05,690.05) -175,690.05 -175,613 ccw(c-155,613) -155,593 v1(-79.13,593) -56.13,593 cw(c-56.13,556.5) -19.63,556.5 -19.63,414.63 ccw(c10,414.63) 10,385 v1(162,385)
LED_B: R4.1 U2.17 | length 513.8
  Top Layer w5: v1(-275,235) R4.1
  Top Layer w6: v1(-73.38,538) ccw(c-97.52,562.14) U2.17@-63.38,562.14
  Mid-Layer 2 w5: v1(-275,235) -275,238 ccw(c-275,266) -247,266 -247,481.17 cw(c-224.17,481.17) -224.17,504 -89.38,504 ccw(c-89.38,520) -73.38,520 v1(-73.38,538)
LED_G: R5.1 U2.15 | length 461.4
  Top Layer w5: v1(-275,275) R5.1 ; v1(-92.87,522) U2.15@-92.87,568
  Mid-Layer 2 w5: v1(-275,275) -275,278 ccw(c-275,296) -257,296 -257,482.49 cw(c-224.18,482.49) -224.18,515.31 -99.56,515.31 ccw(c-99.56,522) v1(-92.87,522)
LED_R: R6.1 U2.14 | length 401.7
  Top Layer w6: v1(-275,315) R6.1 ; v1(-110.62,540) U2.14
  Mid-Layer 2 w5: v1(-275,315) -275,317 -275,321 ccw(c-275,329) -267,329 -267,485.91 cw(c-226.99,485.91) -226.99,525.92 -124.7,525.92 ccw(c-124.7,540) v1(-110.62,540)
NetC3_2: C3.2 U1.4 | length 43.8
  Top Layer w6: U1.4@-224,441 U1.4
  Top Layer w10: C3.2 U1.4@-224,441
NetC17_2: C17.2 L3.2 L4.1 | length 72
  Top Layer w13: L3.2 L4.1
NetD1_2: D1.2 R3.2 | length 40
  Top Layer w10: D1.2 R3.2
NetD2_1: D2.1 R5.2 | length 106.1
  Top Layer w6: D2.1 -263,197 ccw(c-263,215) -245,215 -245,256 cw(c-226,256) R5.2
NetD2_2: D2.2 R4.2 | length 45.4
  Top Layer w6: D2.2 -226,191 R4.2
NetD2_4: D2.4 R6.2 | length 243
  Top Layer w6: D2.4 -263,147 cw(c-250,147) -260.87,154.13 cw(c-250,147) -257.13,157.87 cw(c-250,147) -250,160 -220,160 ccw(c-220,175) -205,175 -205,290 ccw(c-226,290) -226,311 R6.2
NetL1_2: L1.2 L2.1 | length 61.5
  Top Layer w10: L2.1 -100.5,940 cw(c-100.5,929.5) -90,929.5 L1.2
RFPIN: C16.2 L3.1 U2.24 | length 261.2
  Top Layer w10: U2.24 C16.2@55,639.38
  Top Layer w13: C16.2 194.38,639.38 ccw(c194.38,680) 235,680 L3.1
SWCLK: SWD.3 U2.20 | length 628.8
  Top Layer w5: U2.20 -16.13,556.57 ccw(c-5.43,556.57) -13,549 cw(c-20.24,541.76) -10,541.76 -10,483.74 ccw(c5.74,483.74) 5.74,468 82.5,468 cw(c82.5,445.5) 105,445.5 105,366.89 ccw(c131.89,366.89) 131.89,340 190,340 cw(c190,316) 214,316 214,199.35 ccw(c255,199.35) 255,158.35 SWD.3
SWDIO: SWD.2 U2.19 | length 686.8
  Top Layer w5: U2.19 -31.88,562.2 ccw(c-11.8,562.2) -26,548 cw(c-40.49,533.51) -20,533.51 -20,480.77 ccw(c3.38,480.77) 3.38,457.39 79.99,457.39 cw(c79.99,442.38) 95,442.38 95,360 ccw(c125,360) 125,330 185,330 cw(c185,311) 204,311 204,160.28 ccw(c255,160.28) 255,109.28 SWD.2
UART_RX: P1.7 SWD.5 U2.22 | length 1362.1
  Top Layer w5: U2.22 22.12,607.88 cw(c22.12,595) 35,595 35,505 ccw(c62,505) 62,478 87.19,478 cw(c87.19,450.19) 115,450.19 115,372.69 ccw(c137.69,372.69) 137.69,350 195,350 cw(c195,321) 224,321 224,290.89 ccw(c255,290.89) 255,259.89 SWD.5
  Mid-Layer 2 w5: v1@27.5,577.88 cw(c27.5,594.88) 10.5,594.88 10.5,716.47 ccw(c-33.03,716.47) -2.23,747.23 cw(c28.53,778.03) -15,778.03 -15,1281.13 cw(c49.93,1281.13) P1.7
  other v1: 27.5,572.88
UART_TX: P1.5 SWD.6 U2.23 | length 1273.7
  Top Layer w5: U2.23 16.37,623.63 cw(c16.37,595) 45,595 45,510 ccw(c67,510) 67,488 91.53,488 cw(c91.53,454.53) 125,454.53 125,380 ccw(c145,380) 145,360 195,360 cw(c195,300) SWD.6
  Top Layer w6: v1(-17,623.63) U2.23
  Mid-Layer 2 w5: P1.5 -50.07,1335.07 cw(c-50.07,1310) -25,1310 -25,773.03 ccw(c18.53,773.03) -12.27,742.27 cw(c-43.03,711.47) 0.5,711.47 0.5,646.13 cw(c-17,646.13) v1@-17,628.63
XC1: C18.2 U2.28 X1.1 | length 138
  Top Layer w5: U2.28 28.37,702.37 ccw(c28.37,713.5) 39.5,713.5 39.5,733.5 cw(c56,733.5) C18.2@56,750
  Top Layer w6: C18.2@60,760 ccw(c60,775) 75,775 75,779 cw(c92,779) X1.1@92,796
XC2: C19.2 U2.29 X1.3 | length 221.7
  Top Layer w5: U2.29 22.62,718.12 ccw(c22.62,725) 29.5,725 29.5,771.9 ccw(c18.4,771.9) 26.25,779.75 cw(c34.1,787.6) 23,787.6 23,825.04 cw(c48,825.04) 48,850.04 X1.3
  Top Layer w6: C19.2 24.56,876 cw(c24.56,859) X1.3@41.56,859
XL1: C20.2 U2.2 X2.1 | length 210.4
  Top Layer w6: X2.1 -229,869 -215,855 cw(c-229.49,840.51) -209,840.51 -209,785 cw(c-225.9,785) -213.94,773.06 C20.2 -226.92,760 -226.92,759.73 -220.19,753 -219.92,753 -214.96,748.04 cw(c-226.93,736.07) -210,736.07 -210,730 ccw(c-198.12,730) -198.12,718.12 U2.2
XL2: C21.2 U2.3 X2.2 | length 142.3
  Top Layer w6: X2.2 -245,740 ccw(c-227,740) -227,722 C21.2 -218.18,711.18 ccw(c-196.9,732.47) -196.9,702.37 U2.3
pads on no net: ANT.2 CON1. CON1.3 CON1.9 CON1.SH K1. K1.1 K1.2 U2. U3.2 U3.3 U3.7 U3.10 U3.11 U4.3 U4.4 U4.8 U4.12 U5.3

## Polygon pours and split planes (outlines as drawn)
GND on Mid-Layer 1 "Mid-Layer 1-No Net" (solid, remove dead copper, pour order 1): -295.28,59.06 -295.28,1437.01 cw(c-236.22,1437.01) -236.22,1496.06 236.22,1496.06 cw(c236.22,1437.01) 295.28,1437.01 295.28,59.06 cw(c236.22,59.06) 236.22,0 -236.22,0 cw(c-236.22,59.06)
GND on Mid-Layer 2 "Mid-Layer 2-No Net" (solid, remove dead copper, pour order 2): -295.28,59.06 -295.28,1437.01 cw(c-236.22,1437.01) -236.22,1496.06 236.22,1496.06 cw(c236.22,1437.01) 295.28,1437.01 295.28,59.06 cw(c236.22,59.06) 236.22,0 -236.22,0 cw(c-236.22,59.06)
GND on Top Layer "Top Layer-No Net" (solid, remove dead copper, pour order 0): -295.28,59.06 -295.28,1437.01 cw(c-236.22,1437.01) -236.22,1496.06 236.22,1496.06 cw(c236.22,1437.01) 295.28,1437.01 295.28,59.06 cw(c236.22,59.06) 236.22,0 -236.22,0 cw(c-236.22,59.06)
GND on Bottom Layer "Bottom Layer-No Net" (solid, remove dead copper, pour order 3): -295.28,59.06 -295.28,1437.01 cw(c-236.22,1437.01) -236.22,1496.06 236.22,1496.06 cw(c236.22,1437.01) 295.28,1437.01 295.28,59.06 cw(c236.22,59.06) 236.22,0 -236.22,0 cw(c-236.22,59.06)

## Other copper
Top Layer:
  region net +VBUS: -230,534 ccw(c-230,524) -240,524 -240,475 ccw(c-230,475) -230,465 -210,465 cw(c-210,455) -200,455 -180,455 -180,475 ccw(c-190,475) -190,485 -205,485 cw(c-205,495) -215,495 -215,524 ccw(c-225,524) -225,534
  region net +VBUS: -83,312.25 -83,332.81 cw(c-60.81,332.81) -76.5,348.5 ccw(c-92.19,364.19) -70,364.19 -70,375 ccw(c-80,375) -80,385 -170,385 cw(c-170,395) -180,395 -180,455 -200,455 -200,360 ccw(c-190,360) -190,350 -115,350 cw(c-115,341) -106,341 -106,311.75
  pour cut-out: -221,1256 -119,1256 -119,1154 -221,1154
Mid-Layer 1:
  region net GND: -132,708 -42,708 -42,618 -132,618
Bottom Layer:
  region net +VBUS: -99.49,323 ccw(c-99.49,313) -109.49,313 -109.49,288 ccw(c-99.49,288) -99.49,278 99.49,278 ccw(c99.49,288) 109.49,288 109.49,313 ccw(c99.49,313) 99.49,323
Multi-Layer:
  pour cut-out: 150,1165 ccw(c150,1145) 130,1145 130,825 ccw(c150,825) 150,805 295,805 295,1165

## Silkscreen, mask and mechanical layers (free items; w line width, h text height)
Top Overlay:
  circle w16: c170,945 r4
  circle w10: c220,25 r5
  lines w10: -274.82,1421.31 ccw(c-250.07,1446.06) -225.32,1470.81
  lines w16: 75,945 cw(c170,945) 170,1040 ; 105,945 cw(c170,945) 170,1010 ; 135,945 cw(c170,945) 170,980
  text "KitSprout" at -50,1210 h80
  text "KSIMU v1.0" at -50,1150 h72
Bottom Overlay:
  lines w10: -274.82,1421.31 ccw(c-250.07,1446.06) -225.32,1470.81
  text "3V" at -225.07,1286.06 h60 r90
  text "GD" at -125.07,1286.06 h60 r90
  text "02" at -25.07,1286.06 h60 r90
  text "03" at 74.93,1286.06 h60 r90
  text "28" at 174.93,1286.06 h60 r90
  text "30" at 274.93,1286.06 h60 r90
  text "18" at -225.07,1206.06 h60 r90
  text "04" at -125.07,1206.06 h60 r90
  text "17" at -25.07,1206.06 h60 r90
  text "16" at 74.93,1206.06 h60 r90
  text "29" at 174.93,1206.06 h60 r90
  text "08" at 274.93,1206.06 h60 r90
  text "VBUS" at -34.86,174.41 h60 r90
  text "GND" at 67.5,174.41 h60 r90
Mechanical 1:
  the board outline again, w2
Mechanical 2:
  lines w2: -295.28,59.06 ccw(c-236.22,59.06) -236.22,0 ; -295.28,59.06 -295.28,0 -236.22,0 ; -295.28,59.06 -295.28,1437.01 cw(c-236.22,1437.01) -236.22,1496.06 236.22,1496.06 ; -236.22,0 236.22,0 ccw(c236.22,59.06) 295.28,59.06 295.28,1437.01 ; 236.22,1496.06 cw(c236.22,1437.01) 295.28,1437.01 ; 236.22,1496.06 295.28,1496.06 295.28,1437.01 ; -385,-88.94 385,-88.94 385,1585 -385,1585 -385,-88.94

## Dimensions
236.22,1496.06 to 236.22,0 on Mechanical 2
-295.28,1437.01 to 295.28,1437.01 on Mechanical 2

## Text inside footprints (layer, text, board x,y; h text height)
ANT: Bottom Top Componment/Botton Componment "NC" at 200,1038 h30
D1: Bottom Top Componment/Botton Componment "+" at -235,36.99 h20
D2: Bottom Top Componment/Botton Componment "B" at -234.93,217.08 h20 r270; Bottom Top Componment/Botton Componment "R" at -290.85,139.16 h20 r270; Bottom Top Componment/Botton Componment "+" at -234.88,139.16 h20 r270; Bottom Top Componment/Botton Componment "G" at -290.8,217.08 h20 r270
U3: Bottom Top Componment/Botton Componment "X" at -195,1033 h30 r270; Bottom Top Componment/Botton Componment "Y" at -125,1098 h30 r270
U4: Bottom Top Componment/Botton Componment "X" at -184.3,1192.65 h30 r180; Bottom Top Componment/Botton Componment "Y" at -114.81,1259.2 h30 r180